# Altium PCB DIOT_Sampler.PCBDOC (part 8 of 8)
Units mm, origin at the board's own origin, x right, y up, seen from the top; angles counter-clockwise.
Board outline 221.17 x 100 mm, 4 copper layers (Top, GP1(GND), L3, Bot), stack 1.648 mm thick; 666 components, 413 nets, 2132 pads, 925 vias.
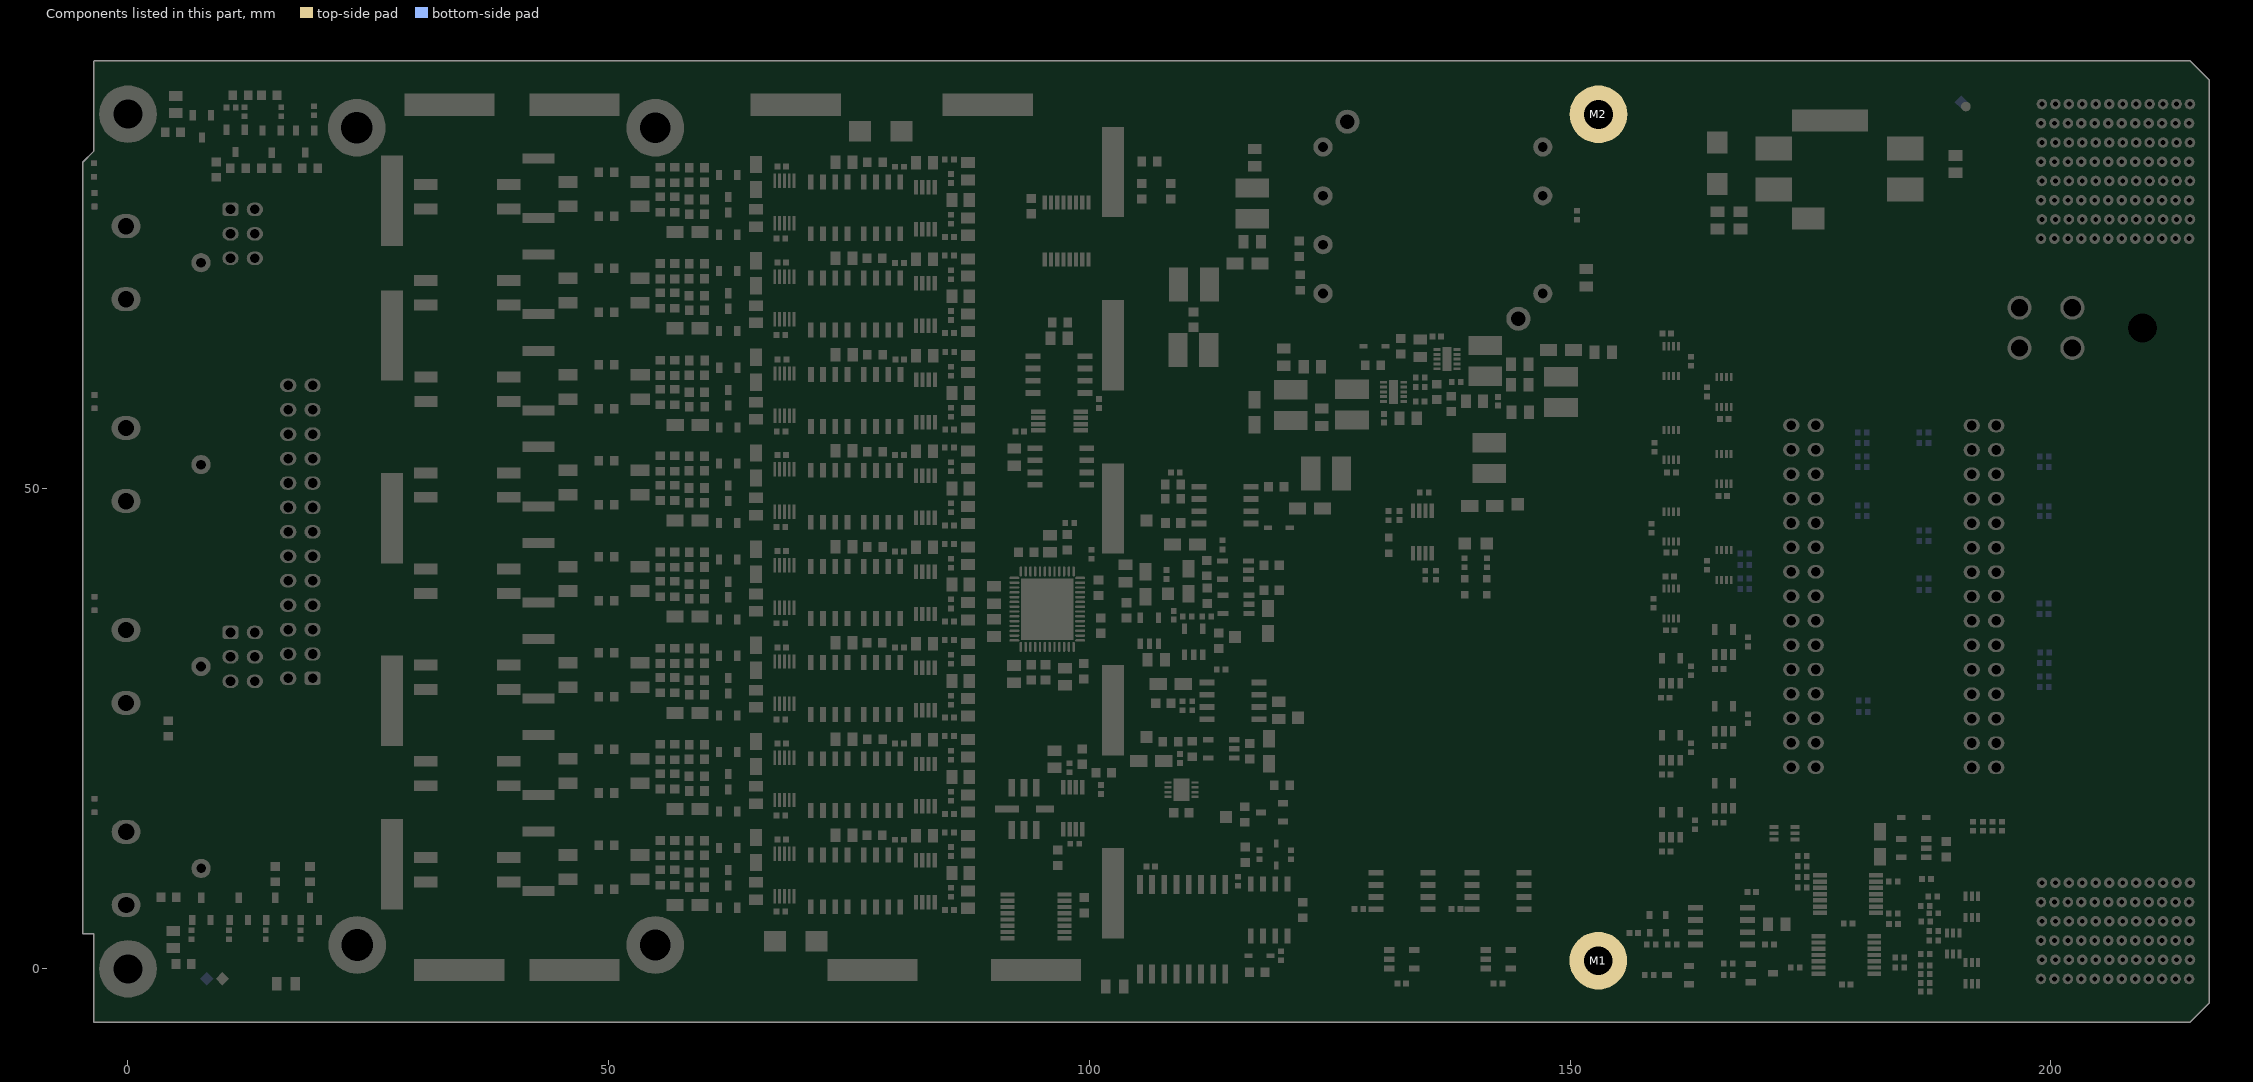
[diagram p9: the components of this part, seen from the top]

## Silkscreen, mask and mechanical layers (free items; w line width, h text height)
TopOverlay:
  drawing of 2477 lines, arcs and shapes, not listed
  text "WUT ISE 2021" at 27.63,114.25 h1.02
  text "Sampler vx.x.x" at 98.519,91.73 h2.03
  text "WUT ISE 2024" at 101.244,90.08 h1.02
  text "CH0" at 33.369,84.255 h1.02
  text "DIOT" at 198.43,78.532 h1.14 r90
  text "on" at 39.457,74.897 h1.02
  text "off" at 29.957,74.647 h1.02
  text "CH1" at 34.119,74.255 h1.02
  text "on" at 39.207,64.836 h1.02
  text "off" at 29.707,64.586 h1.02
  text "CH2" at 34.119,64.255 h1.02
  text "EEM1" at 170.109,61.663 h1.14
  text "EEM0" at 188.88,61.638 h1.14
  text "Power +12V" at 203.109,59.457 h1.14
  text "Termination" at 44.669,55.155 h1.02
  text "on" at 39.457,55.086 h1.02
  text "off" at 29.957,54.836 h1.02
  text "CH3" at 33.869,54.255 h1.02
  text "+12V" at 150.694,53.63 h1.02
  text "+12V" at 106.194,47.88 h1 r90
  text "on" at 39.207,45.086 h1.02
  text "off" at 29.707,44.836 h1.02
  text "P3V3A" at 143.754,44.525 h1.02
  text "CH4" at 33.869,44.255 h1.02
  text "REF / VCC" at 104.444,42.66 h1
  text "on" at 38.207,35.086 h1.02
  text "off" at 30.194,34.88 h1.02
  text "CH5" at 33.869,34.255 h1.02
  text "P2V5" at 114.694,32.63 h1
  text "N12VA" at 104.419,25.705 h1.02
  text "DIOT Sampler / V3.0 / WUT ISE 2024" at 134,25.7 h1.02
  text "on" at 39.457,25.086 h1.02
  text "Termination" at 44.894,25.03 h1.02
  text "off" at 29.957,24.836 h1.02
  text "CH6" at 33.869,24.255 h1.02
  text "P6V0A" at 121.574,20.287 h1 r90
  text "P5V0A" at 113.778,17.959 h1
  text "on" at 39.457,15.086 h1.02
  text "off" at 29.957,14.836 h1.02
  text "CH7" at 34.119,14.255 h1.02
  text "I2C1" at 178.336,6.275 h1 r90
  text "Designed by Pawel Kulik" at 35,3.5 h0.6
  text "DIOT" at 198.53,-0.22 h1.14 r90
  text "FPGA DONE" at 11.498,-2.3 h1
BottomOverlay:
  drawing of 2471 lines, arcs and shapes, not listed
  text "WUT ISE 2021" at 9.619,112.65 h1.02
  text "EEM FMC Carrier v1.1" at 14.1,58.12 h1.5 r90
  text "Licensed under CERN-OHL-W v2 or later / https://ohwr.org/cernohl / https://github.com/sinara-hw/EEM_FMC_Carrier" at 4.283,24.188 h1.2 r270
  text "Sampler v2.3.1" at 125.444,1.88 h2.03
  text "WUT ISE 2021" at 118.457,-2.097 h1.02
TopSolder:
  rectangle: 1.448,-4.947 216.417,-3.15
  rectangle: -0.202,-4.947 1.975,-3.175
  rectangle: -2.379,-4.947 -0.202,-3.15
  region: 202.467,46.205 202.467,42.705 216.43,42.705 216.43,46.205
BottomSolder:
  rectangle: 1.367,-4.947 216.417,-3.15
  rectangle: -2.379,-4.947 -0.202,-3.15
  rectangle: -0.202,-4.947 1.975,-3.175
  rectangle: 93.119,34.355 98.119,40.48
  region: 202.467,46.205 202.467,42.705 216.43,42.705 216.43,46.205
M1 Board Shape:
  drawing of 308 lines, arcs and shapes, not listed
  text "Layer" at 38.398,158.93 h1.52
  text "Name" at 48.81,158.93 h1.52
  text "Material" at 70.902,158.93 h1.52
  text "Thickness" at 92.74,158.93 h1.52
  text "Constant" at 109.246,158.93 h1.52
  text "Board Layer Stack" at 123.721,158.93 h1.52
  text "TopOverlay" at 48.81,155.882 h1.52
  text "TopSolder" at 48.81,152.834 h1.52
  text "Solder Resist" at 70.902,152.834 h1.52
  text "0,40mil" at 92.74,152.834 h1.52
  text "3.5" at 109.246,152.834 h1.52
  text "1" at 38.398,149.786 h1.52
  text "Top" at 48.81,149.786 h1.52
  text "2,28mil" at 92.74,149.786 h1.52
  text "Dielectric1" at 48.81,146.738 h1.52
  text "FR-4" at 70.902,146.738 h1.52
  text "7,09mil" at 92.74,146.738 h1.52
  text "4.8" at 109.246,146.738 h1.52
  text "2" at 38.398,143.69 h1.52
  text "GP1(GND)" at 48.81,143.69 h1.52
  text "1,42mil" at 92.74,143.69 h1.52
  text "Dielectric 3" at 48.81,140.642 h1.52
  text "43,31mil" at 92.74,140.642 h1.52
  text "4.2" at 109.246,140.642 h1.52
  text "3" at 38.398,137.594 h1.52
  text "L3" at 48.81,137.594 h1.52
  text "1,42mil" at 92.74,137.594 h1.52
  text "Dielectric2" at 48.81,134.546 h1.52
  text "FR-4" at 70.902,134.546 h1.52
  text "7,09mil" at 92.74,134.546 h1.52
  text "4.2" at 109.246,134.546 h1.52
  text "4" at 38.398,131.498 h1.52
  text "Bot" at 48.81,131.498 h1.52
  text "2,28mil" at 92.74,131.498 h1.52
  text "BottomSolder" at 48.81,128.45 h1.52
  text "Solder Resist" at 70.902,128.45 h1.52
  text "0,40mil" at 92.74,128.45 h1.52
  text "3.5" at 109.246,128.45 h1.52
  text "BottomOverlay" at 48.81,125.402 h1.52
M2 Old Board Shape:
  lines w0.1: -6.114,-19.788 -6.114,102.894
Mechanical4:
  lines w1: 27.444,-0.12 27.444,89.88 102.444,89.88 102.444,-0.12 27.444,-0.12 ; 113.444,53.88 113.444,88.88 153.444,88.88 153.444,53.88 113.444,53.88
Mechanical13:
  lines w0.01: -6.352,-6.334 -6.352,75.374
Mechanical15:
  lines w0.1: -5.9,3.65 -5.9,82.695 -3.57,85.025 -3.57,94.349 -3.469,94.45 214.469,94.45 216.469,92.45 216.469,-3.55 214.469,-5.55 -3.57,-5.55 -3.57,1.65 -3.57,3.65 -5.9,3.65 ; 169.152,17.126 169.152,60.386 179.392,60.386 179.392,17.126 169.152,17.126 ; 187.922,17.1 198.162,17.1 198.162,60.36 187.922,60.36 187.922,17.1
DrillDrawing:
  rectangle: 111.544,60.38 113.444,61.055

## Text inside footprints (layer, text, board x,y; h text height)
J1: TopOverlay "30" at 195.709,21.585 h1.02 r270; Mechanical14 "30" at 195.709,21.585 h1.02 r270
J2: TopOverlay "30" at 176.939,21.611 h1.02 r270; Mechanical14 "30" at 176.939,21.611 h1.02 r270
J4: Mechanical14 "Board Edge" at -4.874,71.142 h1 r90
J5: Mechanical14 "Board Edge" at -4.874,50.142 h1 r90
J6: Mechanical14 "Board Edge" at -4.874,29.142 h1 r90
J7: Mechanical14 "Board Edge" at -4.869,8.142 h1 r90
J8: DrillDrawing "Diam. 0.5mm +/-0.05" at 215.119,12.95 h1 r180; DrillDrawing "PRESS-FIT TECHNOLOGY" at 215.119,11.45 h1 r180; TopOverlay "6" at 194.419,8.6 h1 r90; TopOverlay "5" at 194.419,6.6 h1 r90; TopOverlay "4" at 194.419,4.6 h1 r90; TopOverlay "3" at 194.419,2.6 h1 r90; TopOverlay "2" at 194.419,0.6 h1 r90; TopOverlay "1" at 194.419,-1.4 h1 r90; TopOverlay "L" at 199.469,-3.25 h1 r90; TopOverlay "K" at 200.869,-3.25 h1 r90; TopOverlay "J" at 202.269,-3.25 h1 r90; TopOverlay "I" at 203.669,-3 h1 r90; TopOverlay "H" at 205.069,-3.25 h1 r90; TopOverlay "G" at 206.469,-3.25 h1 r90; TopOverlay "F" at 207.869,-3.25 h1 r90; TopOverlay "E" at 209.269,-3.25 h1 r90; TopOverlay "D" at 210.669,-3.25 h1 r90; TopOverlay "C" at 212.069,-4.25 h1 r90; TopOverlay "B" at 213.469,-4.25 h1 r90; TopOverlay "A" at 214.869,-4.25 h1 r90; Mechanical14 "6" at 194.419,8.6 h1 r90; Mechanical14 "5" at 194.419,6.6 h1 r90; Mechanical14 "4" at 194.419,4.6 h1 r90; Mechanical14 "3" at 194.419,2.6 h1 r90; Mechanical14 "2" at 194.419,0.6 h1 r90; Mechanical14 "1" at 194.419,-1.4 h1 r90; Mechanical14 "L" at 199.469,-3.25 h1 r90; Mechanical14 "K" at 200.869,-3.25 h1 r90; Mechanical14 "J" at 202.269,-3.25 h1 r90; Mechanical14 "I" at 203.669,-3 h1 r90; Mechanical14 "H" at 205.069,-3.25 h1 r90; Mechanical14 "G" at 206.469,-3.25 h1 r90; Mechanical14 "F" at 207.869,-3.25 h1 r90; Mechanical14 "E" at 209.269,-3.25 h1 r90; Mechanical14 "D" at 210.669,-3.25 h1 r90; Mechanical14 "C" at 212.069,-4.25 h1 r90; Mechanical14 "B" at 213.469,-4.25 h1 r90; Mechanical14 "A" at 214.869,-4.25 h1 r90; Mechanical8 "Edge of Daugher Card" at 217.219,0.725 h0.5 r90; Mechanical8 "Top Surface of Mother Board" at 228.719,-0.425 h0.5 r90
J9: DrillDrawing "PRESS-FIT TECHNOLOGY" at 215.119,92.45 h1 r180; DrillDrawing "Diam. 0.5mm +/-0.05" at 215.119,93.95 h1 r180; TopOverlay "A" at 214.869,72.75 h1 r90; TopOverlay "B" at 213.469,72.75 h1 r90; TopOverlay "C" at 212.069,72.75 h1 r90; TopOverlay "D" at 210.669,73.75 h1 r90; TopOverlay "E" at 209.269,73.75 h1 r90; TopOverlay "F" at 207.869,73.75 h1 r90; TopOverlay "G" at 206.469,73.75 h1 r90; TopOverlay "H" at 205.069,73.75 h1 r90; TopOverlay "I" at 203.669,74 h1 r90; TopOverlay "J" at 202.269,73.75 h1 r90; TopOverlay "K" at 200.869,73.75 h1 r90; TopOverlay "L" at 199.469,73.75 h1 r90; TopOverlay "1" at 194.419,75.6 h1 r90; TopOverlay "2" at 194.419,77.6 h1 r90; TopOverlay "3" at 194.419,79.6 h1 r90; TopOverlay "4" at 194.419,81.6 h1 r90; TopOverlay "5" at 194.419,83.6 h1 r90; TopOverlay "6" at 194.419,85.6 h1 r90; TopOverlay "8" at 194.419,89.6 h1 r90; TopOverlay "7" at 194.419,87.6 h1 r90; Mechanical14 "A" at 214.869,72.75 h1 r90; Mechanical14 "B" at 213.469,72.75 h1 r90; Mechanical14 "C" at 212.069,72.75 h1 r90; Mechanical14 "D" at 210.669,73.75 h1 r90; Mechanical14 "E" at 209.269,73.75 h1 r90; Mechanical14 "F" at 207.869,73.75 h1 r90; Mechanical14 "G" at 206.469,73.75 h1 r90; Mechanical14 "H" at 205.069,73.75 h1 r90; Mechanical14 "I" at 203.669,74 h1 r90; Mechanical14 "J" at 202.269,73.75 h1 r90; Mechanical14 "K" at 200.869,73.75 h1 r90; Mechanical14 "L" at 199.469,73.75 h1 r90; Mechanical14 "1" at 194.419,75.6 h1 r90; Mechanical14 "2" at 194.419,77.6 h1 r90; Mechanical14 "3" at 194.419,79.6 h1 r90; Mechanical14 "4" at 194.419,81.6 h1 r90; Mechanical14 "5" at 194.419,83.6 h1 r90; Mechanical14 "6" at 194.419,85.6 h1 r90; Mechanical14 "8" at 194.419,89.6 h1 r90; Mechanical14 "7" at 194.419,87.6 h1 r90; Mechanical8 "Top Surface of Mother Board" at 228.719,78.575 h0.5 r90; Mechanical8 "Edge of Daugher Card" at 217.219,79.725 h0.5 r90
J10: TopOverlay "1" at 201.285,71.142 h1.2 r270; Mechanical14 "1" at 201.285,71.142 h1.2 r270
SW1A: TopOverlay "1" at 29.426,82.819 h1; Mechanical14 "1" at 29.427,82.824 h1
SW1B: TopOverlay "1" at 29.426,72.819 h1; Mechanical14 "1" at 29.427,72.824 h1
SW1C: TopOverlay "1" at 29.439,62.775 h1; Mechanical14 "1" at 29.44,62.78 h1
SW1D: TopOverlay "1" at 29.426,52.819 h1; Mechanical14 "1" at 29.427,52.824 h1
SW1E: TopOverlay "1" at 29.426,42.819 h1; Mechanical14 "1" at 29.427,42.824 h1
SW1F: TopOverlay "1" at 29.426,32.819 h1; Mechanical14 "1" at 29.427,32.824 h1
SW1G: TopOverlay "1" at 29.426,22.819 h1; Mechanical14 "1" at 29.427,22.824 h1
SW1H: TopOverlay "1" at 29.426,12.819 h1; Mechanical14 "1" at 29.427,12.824 h1